# Altium PCB PCB_weatherstation_2024-12-12.pcbdoc
Units mil, origin at the board's own origin, x right, y up, seen from the top; angles counter-clockwise.
Board outline 2961.49 x 2661.49 mil, 2 copper layers (Top Layer, Bottom Layer); 7 components, 20 nets, 38 pads, 15 vias.
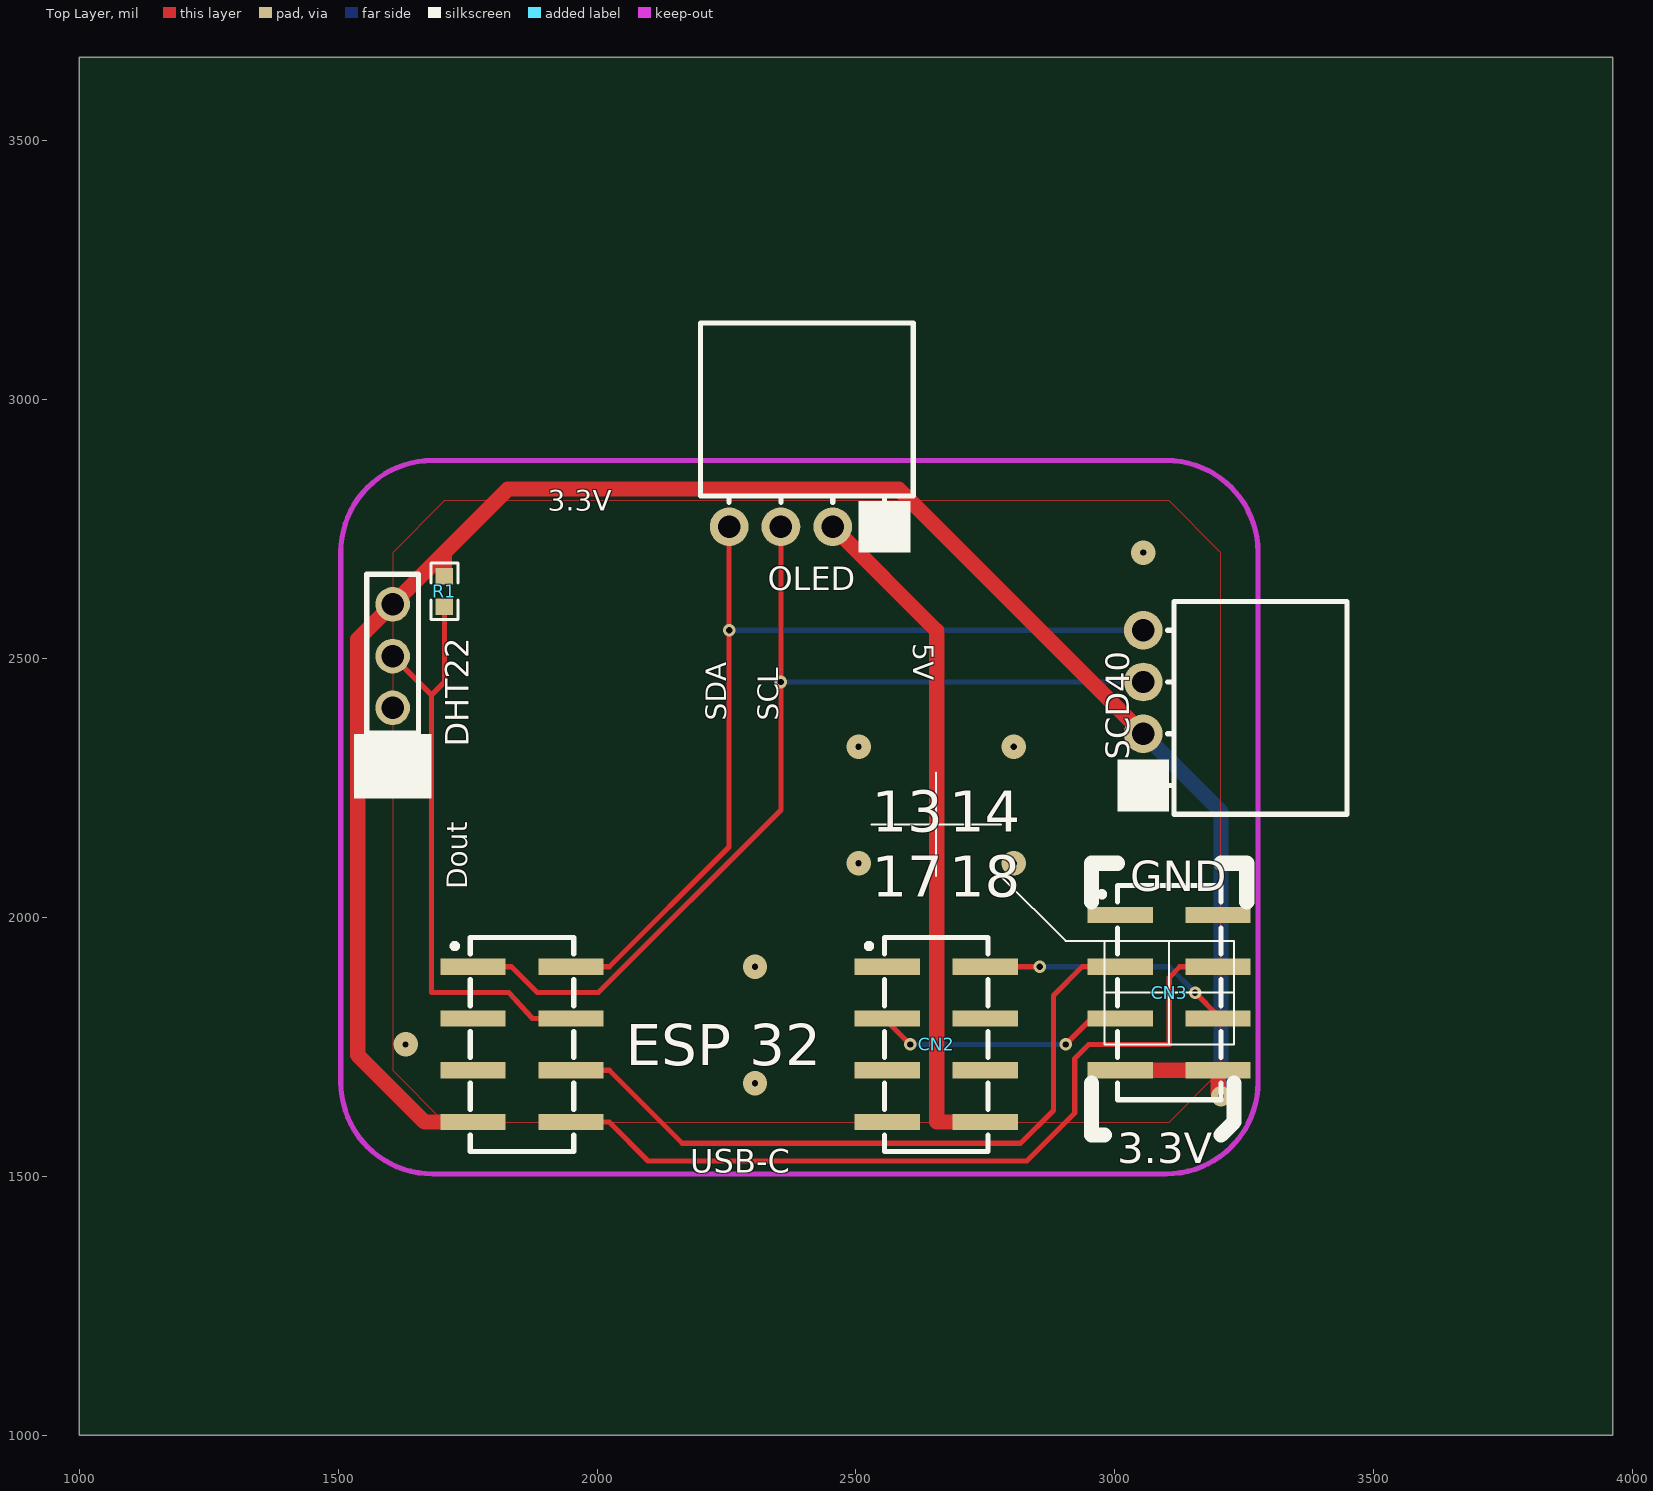
[diagram p0: Top Layer view]
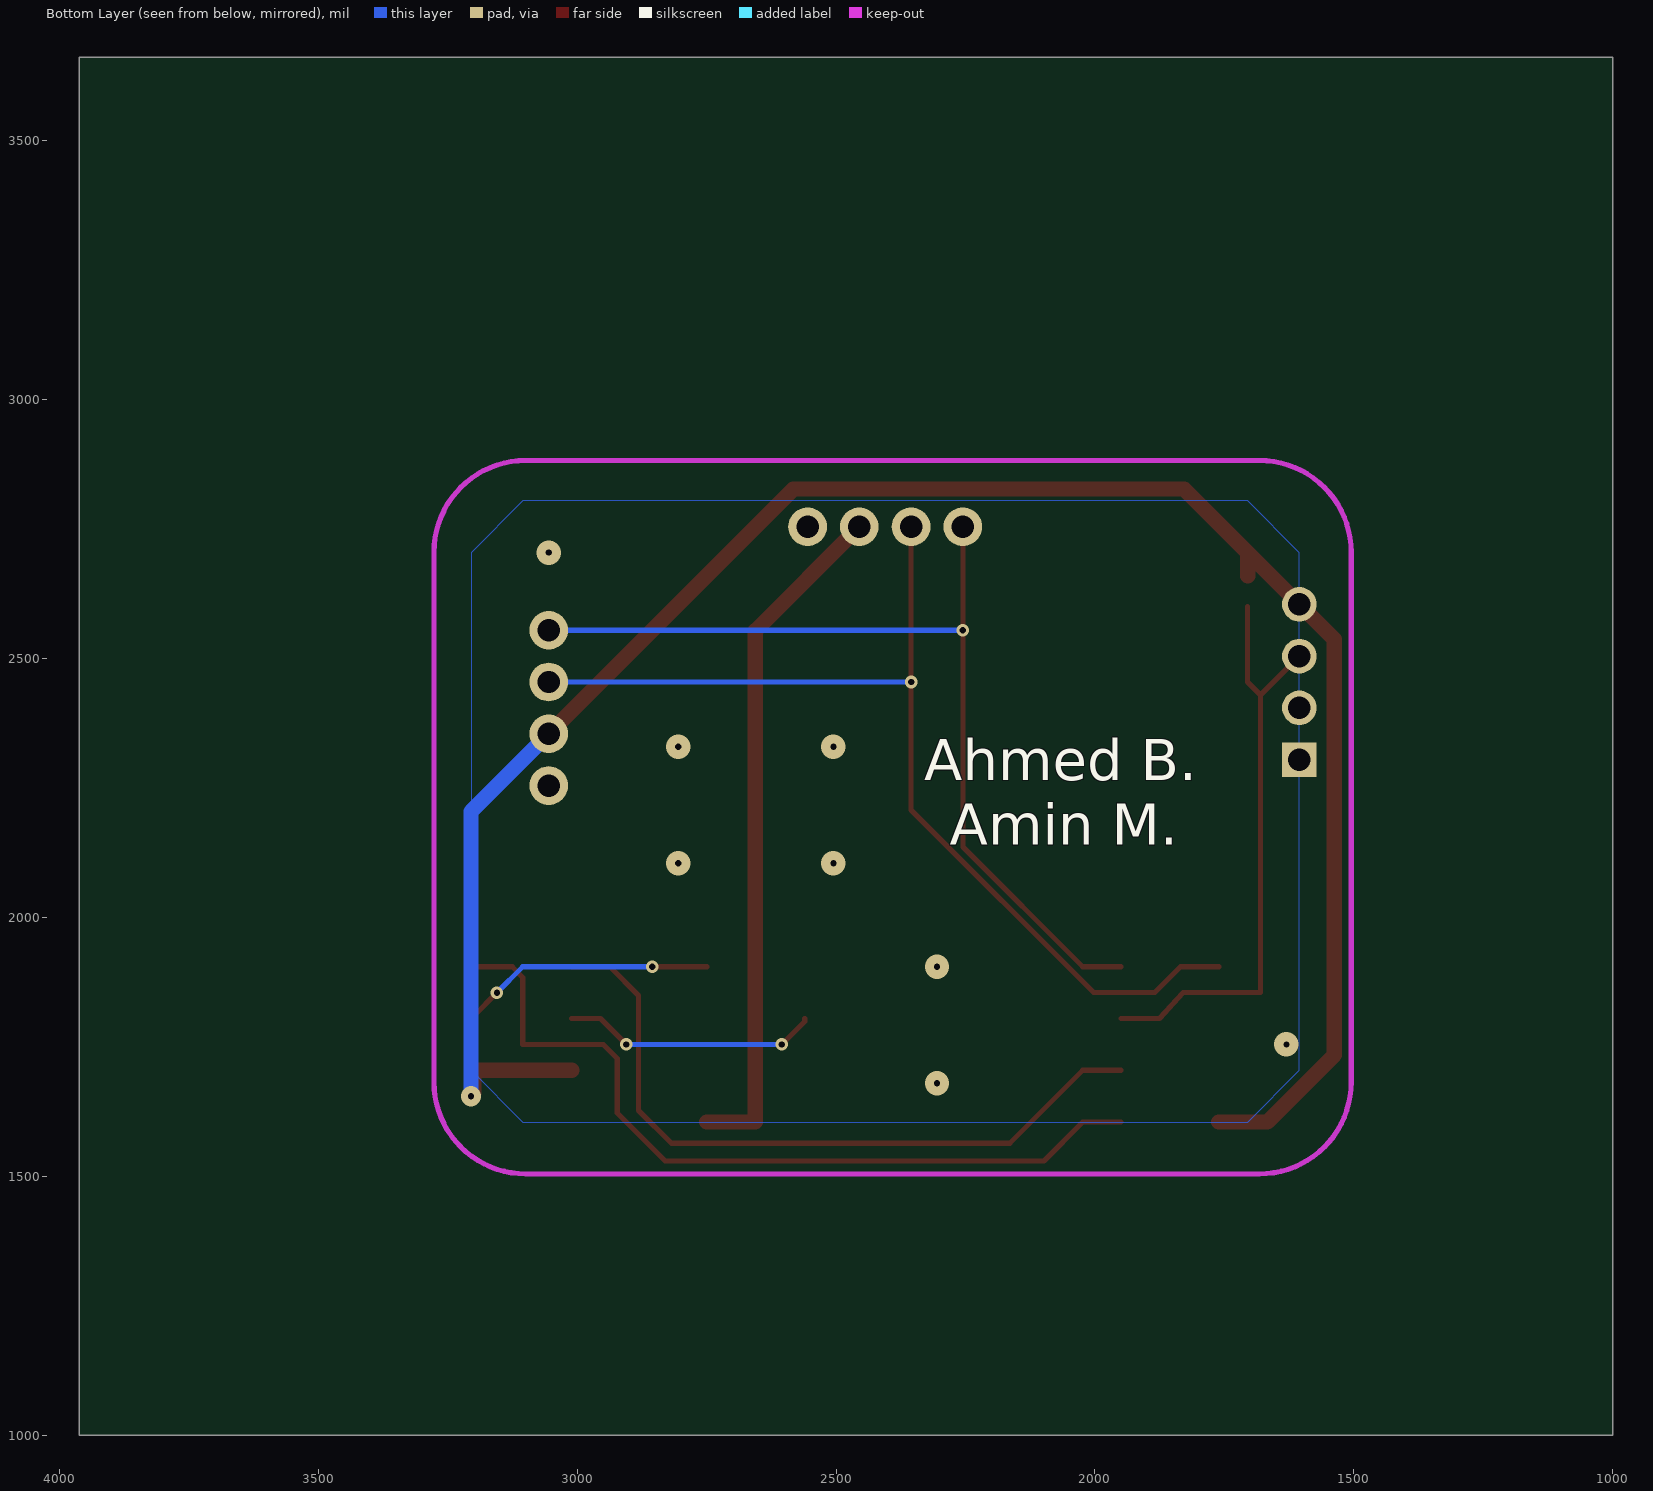
[diagram p1: Bottom Layer view, seen from below]

## Layer stack, top to bottom
Top Layer: signal copper (thickness not stored)
Dielectric: dielectric 12.6, FR-4, Dk 4.8
Bottom Layer: signal copper (thickness not stored)

## Board outline
3961.49,1000 1000,1000 1000,3661.49 3961.49,3661.49

## Components (designator, comment, footprint, x,y, rotation, side; value= is the part's Value field where it differs from the comment)
CN2 "PM254-2-04-S-8.5" HDR-SMD_8P-P2.54-V-F-R2-C4-S7.1 2655.01,1755.01 r270 top
CN3 "PM254-2-04-S-8.5" HDR-SMD_8P-P2.54-V-F-R2-C4-S7.1 3105.01,1855.01 r270 top
DHT22 "2.54-1*4P母" HDR-TH_4P-P2.54-V-F 1605,2455 r90 top
OLED "PM254-1-04-W-8.5" HDR-TH_4P-P2.54-H-F-W10.0-N 2405,2755 r180 top
R1 "10kΩ" R0603 1705,2630 r90 top
SCD40 "PM254-1-04-W-8.5" HDR-TH_4P-P2.54-H-F-W10.0-N 3055,2405 r90 top
USB-C "PM254-2-04-S-8.5" HDR-SMD_8P-P2.54-V-F-R2-C4-S7.1 1855.01,1755.01 r270 top

## Footprints (in the part's own frame and the unit in brackets; to place one, negate y for a bottom-side part, rotate by r counter-clockwise, add the part's x,y. Pads: shape width x height; smd on the part's side, far side on the other; paste and mask are expansions set on the pad)
HDR-SMD_8P-P2.54-V-F-R2-C4-S7.1 [mm]
  rect 0.8x3.2 smd paste+0 mask+0.051: 1(-3.81,-2.4) 2(-3.81,2.4) 3(-1.27,-2.4) 4(-1.27,2.4) 5(1.27,-2.4) 6(1.27,2.4) 7(3.81,-2.4) 8(3.81,2.4)
  silkscreen extent -5.25,-3.43 5.25,2.54
HDR-TH_4P-P2.54-H-F-W10.0-N [mm]
  round 1.9 hole 1.1 paste+0 mask+0.05: 1(-3.81,0) 2(-1.27,0) 3(1.27,0) 4(3.81,0)
  silkscreen extent -5.22,-10 5.22,-1.18
HDR-TH_4P-P2.54-V-F [mm]
  rect 1.7x1.7 hole 1.1 paste+0 mask+0.051: 1(-3.81,0)
  round 1.7 hole 1.1 paste+0 mask+0.051: 2(-1.27,0) 3(1.27,0) 4(3.81,0)
  silkscreen extent -5.29,-1.27 5.29,1.27
R0603 [mil]
  rect 31.75x34.02 smd paste-3937.01 mask+2: 1(-29.66,0) 2(29.66,0)
  silkscreen extent -55,-26 55,26

## Via types
v1: diameter 47.24, hole 12.2, Top Layer to Bottom Layer, tented both sides, 8 vias
v2: diameter 24.41, hole 12.2, Top Layer to Bottom Layer, tented both sides, 4 vias
v3: diameter 24.02, hole 12.01, Top Layer to Bottom Layer, tented both sides, 2 vias
v4: diameter 39.37, hole 12.01, Top Layer to Bottom Layer, tented both sides, 1 vias

## Nets (pads, with @x,y where several pads share a name; then routed paths per layer and width w, separated by ;. In a path a pad name is that pad's centre, name@x,y a point inside that pad or via, vN(x,y) a via of type N, cw(c..) or ccw(c..) an arc to the next point about the centre after c; other vN are vias at no path point)
+3.3V: CN3.7 CN3.8 DHT22.4 R1.2 SCD40.2 USB-C.7 | length 3979.2
  Top Layer w29.53: R1.2 1705,2705 1717.31,2717.3 ; USB-C.7 1667.01,1605.01 1537.51,1734.51 1537.51,2537.51 DHT22.4 1827.6,2827.6 2582.4,2827.6 SCD40.2 ; CN3.7 CN3.8 3199.51,1660.49 v4(3205,1655)
  Bottom Layer w29.53: SCD40.2 3205,2205 v4(3205,1655)
+5V: CN2.8 OLED.2 | length 1326.8
  Top Layer w29.53: OLED.2 2655.98,2554.02 2655.98,1605.01 CN2.8
CN1_1: OLED.3 SCD40.3 USB-C.1 | length 2008.6
  Top Layer w10: USB-C.1 1834.51,1905.01 1884.5,1855 2002.3,1855 2355,2207.7 v2(2355,2455) OLED.3
  Bottom Layer w10: v2(2355,2455) SCD40.3
CN1_2: OLED.4 SCD40.4 USB-C.2 | length 1819.9
  Top Layer w10: USB-C.2 2023.49,1905.01 2255,2136.52 v2(2255,2555) OLED.4
  Bottom Layer w10: v2(2255,2555) SCD40.4
CN1_4: DHT22.3 R1.1 USB-C.4 | length 1153.4
  Top Layer w10: DHT22.3 1680,2430 ; R1.1 1705,2455 1680,2430 ; USB-C.4 1875.52,1805.01 1830,1855 1680,1855 1680,2430
CN1_6: CN3.3 USB-C.6 | length 1390.9
  Top Layer w10: USB-C.6 2023.49,1705.01 2164.39,1564.11 2818.05,1564.11 2881.32,1627.38 2881.32,1849.78 2936.55,1905.01 CN3.3
CN1_8: CN3.4 USB-C.8 | length 1573.9
  Top Layer w10: USB-C.8 2023.49,1605.01 2098.5,1530 2830,1530 2922.5,1622.5 2922.5,1727.8 2949.6,1755 3105,1755 3105,1884.5 3125.5,1905 CN3.4
CN2_2: CN2.2 CN3.6 | length 494.6
  Top Layer w10: CN2.2 2823.49,1905.01 v3(2855,1905) ; v3(3155,1855) 3199.51,1810.49 CN3.6
  Bottom Layer w10: v3(2855,1905) 3105,1905 v3(3155,1855)
CN2_3: CN2.3 CN3.5 | length 494.7
  Top Layer w10: CN2.3 2560.53,1799.47 v2(2605,1755) ; v2(2905,1755) 2955.01,1805.01 CN3.5
  Bottom Layer w10: v2(2605,1755) v2(2905,1755)
GND: CN2.5 CN2.6 CN3.1 CN3.2 DHT22.1 OLED.1 SCD40.1
S$74886: 
S$74890: 
S$74918: 
S$74922: 
S$75079: 
S$75083: 
S$75087: 
S$75091: 
S$75095: 
S$75099: 
pads on no net: CN2.1 CN2.4 CN2.7 DHT22.2 USB-C.3 USB-C.5
copper on no net:
  other v1: 2305,1680 1630,1755 2305,1905 2505,2105 2805,2105 2505,2330 2805,2330 3055,2705

## Polygon pours and split planes (outlines as drawn)
GND on Bottom Layer (solid): 3105,2805 3205,2705 3205,1705 3105,1605 1705,1605 1605,1705 1605,2705 1705,2805
GND on Top Layer (solid): 1705,2805 1605,2705 1605,1705 1705,1605 3105,1605 3205,1705 3205,2705 3105,2805

## Keep-outs
Keep-Out Layer:
  lines w10: 1505,1682.16 ccw(c1682.16,1682.16) 1682.16,1505 ; 1505,2705.78 cw(c1682.16,2705.78) 1682.16,2882.95 ; 3099.49,1505 ccw(c3099.49,1682.16) 3276.65,1682.16 ; 3099.49,2882.95 cw(c3099.49,2705.78) 3276.65,2705.78

## Silkscreen, mask and mechanical layers (free items; w line width, h text height)
Top Overlay:
  rectangle: 3005,2205 3105,2305
  rectangle: 1530,2230 1680,2355
  rectangle: 2505,2705 2605,2805
  lines w3.94 net S$75079: 2530,2180 2780,2180
  lines w3.94 net S$75083: 2655,2080 2655,2280
  lines w3.94 net S$75087: 2980,1755 3230,1755 3230,1955 2980,1955 2980,1755
  lines w3.94 net S$75091: 2980,1855 3230,1855
  lines w3.94 net S$75095: 3105,1755 3105,1955
  lines w3.94 net S$75099: 2780,2080 2905,1955 2980,1955
  lines w29.53 net S$74886: 2955,2030 2955,2105 3005,2105
  lines w29.53 net S$74890: 3205,2105 3245,2105 3255,2105 3255,2030
  lines w29.53 net S$74918: 2955,1680 2955,1580 2980,1580
  lines w29.53 net S$74922: 3205,1580 3230,1605 3230,1680
  text "3.3V" at 1905,2785.32 h39.37
  text "5V" at 2610.32,2530 h39.37 r270
  text "SDA" at 2249.68,2380 h39.37 r90
  text "SCL" at 2349.68,2380 h39.37 r90
  text "13" at 2530,2165.63 h78.74
  text "14" at 2680,2165.63 h78.74
  text "Dout" at 1749.68,2055 h39.37 r90
  text "GND" at 3030,2050.47 h59.05
  text "17" at 2530,2040.63 h78.74
  text "18" at 2680,2040.63 h78.74
  text "ESP 32" at 2055,1715 h80
  text "3.3V" at 3005,1525.47 h59.05
Bottom Overlay:
  text "Ahmed B." at 2330,2265.63 h78.74
  text "Amin M." at 2280,2140.63 h78.74